# EAGLE board stb_v10_panels (EAGLE 6.1)
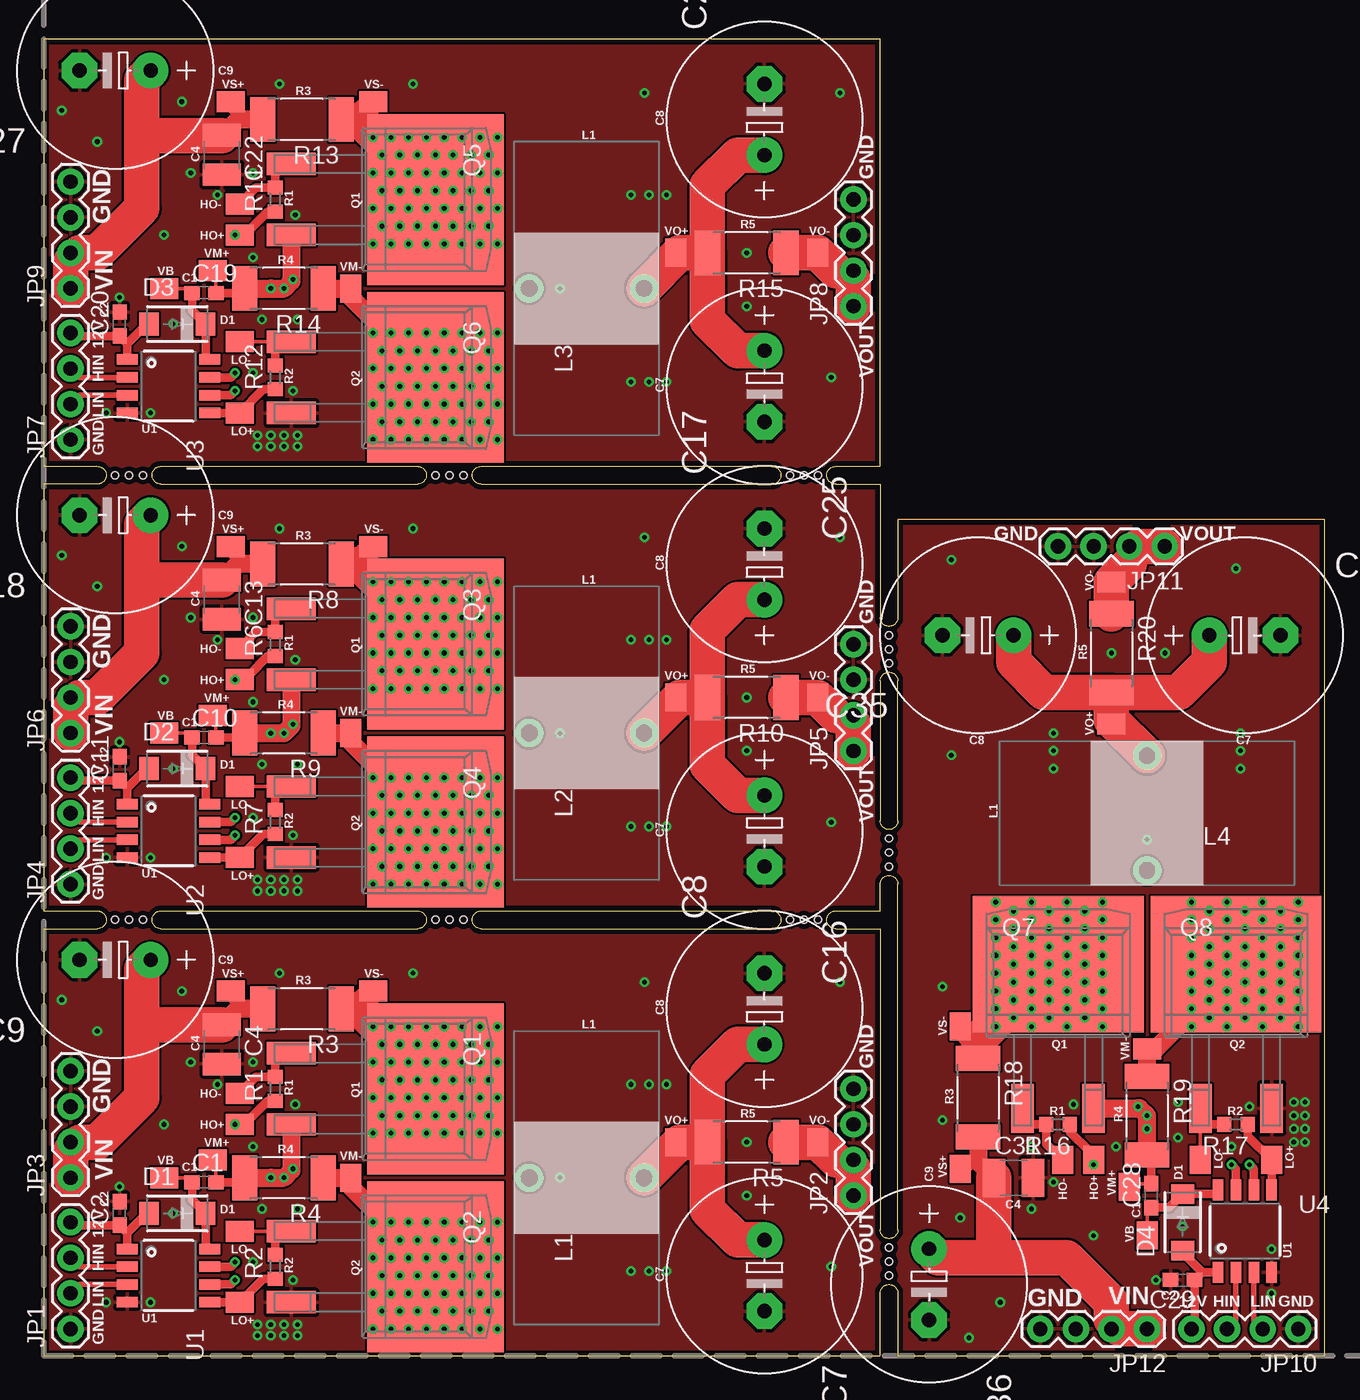
[diagram p0: board, top side]
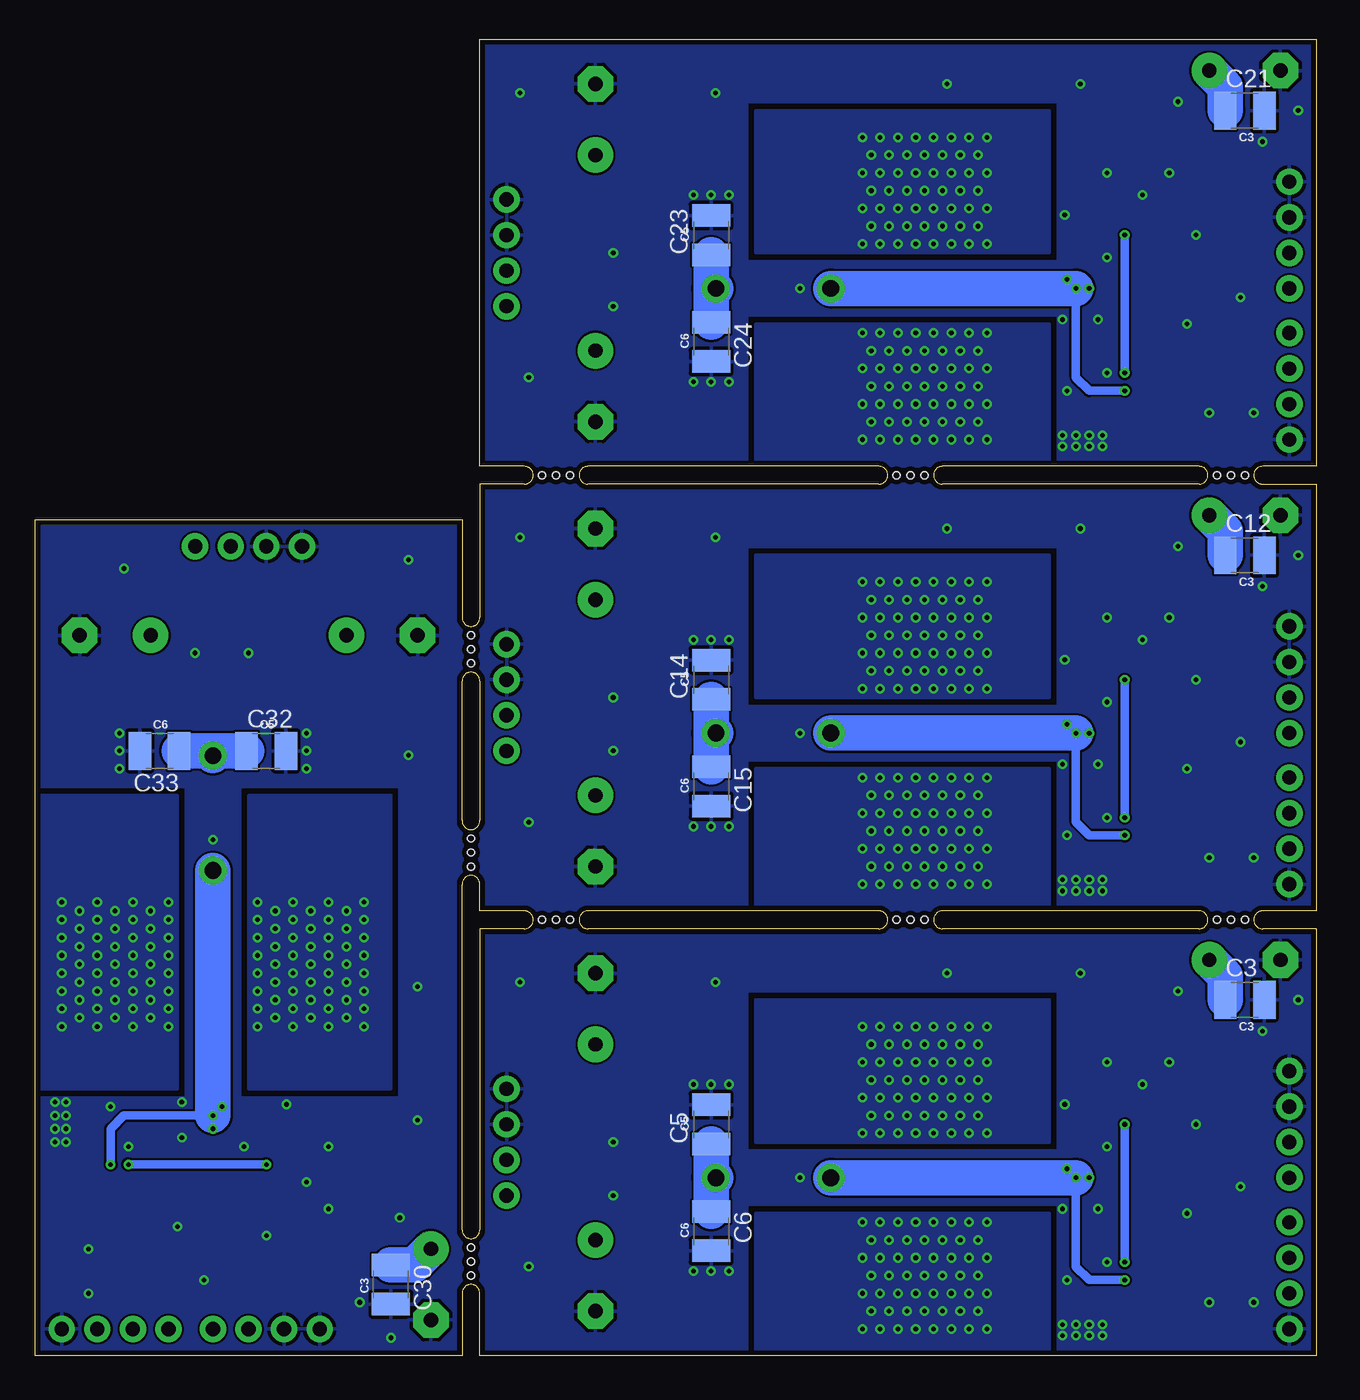
[diagram p1: board, bottom side, seen from below]

Size 91.44 x 93.98 mm. Coordinates in mm from the lower left corner, seen from the top.
Outline: 0,0 59.69,0 59.69,4.45 arc-180 60.96,4.45 60.96,0 91.44,0 91.44,59.69 60.96,59.69 60.96,52.7 arc-180 59.69,52.7 59.69,62.23 56.52,62.23 arc-180 56.52,63.5 59.69,63.5 59.69,93.98 0,93.98 0,63.5 3.81,63.5 arc-180 3.81,62.23 0,62.23 0,31.75 3.81,31.75 arc-180 3.81,30.48 0,30.48 0,0
Outline: 8.35,62.23 arc-180 8.35,63.5 26.67,63.5 arc-180 26.67,62.23 8.35,62.23
Outline: 51.98,63.5 arc-180 51.98,62.23 31.21,62.23 arc-180 31.21,63.5 51.98,63.5
Outline: 8.35,30.48 arc-180 8.35,31.75 26.67,31.75 arc-180 26.67,30.48 8.35,30.48
Outline: 31.21,30.48 arc-180 31.21,31.75 51.98,31.75 arc-180 51.98,30.48 31.21,30.48
Outline: 56.52,30.48 arc-180 56.52,31.75 59.69,31.75 59.69,33.66 arc-180 60.96,33.66 60.96,8.98 arc-180 59.69,8.98 59.69,30.48 56.52,30.48
Outline: 59.69,48.16 arc-180 60.96,48.16 60.96,38.2 arc-180 59.69,38.2 59.69,48.16
Copper layers (1*16): Top 0.0356mm / dielectric 1.5011mm / Bottom 0.0356mm
Design rules: minimum track width 6mil, minimum drill 13mil, track to track 6mil, track to pad 6mil, pad to pad 6mil, via to via 6mil, smd to smd 6mil, copper to edge 15mil, drill to drill 6mil, minimum pad ring 7mil, minimum via ring 7mil, stop-mask expansion 4mil, vias tented up to drill 20mil, thermal gap 10mil
Holes 0.5 mm at 5.08,62.87 55.24,62.87 27.94,62.87 5.08,31.11 27.94,31.11 55.24,31.11 60.33,51.44 60.33,5.71 60.33,34.92 6.08,62.87 7.08,62.87 28.94,62.87 29.94,62.87 54.24,62.87 53.24,62.87 6.08,31.11 7.08,31.11 28.94,31.11 29.94,31.11 54.24,31.11 53.24,31.11 60.33,35.92 60.33,36.92 60.33,50.44 60.33,49.44 60.33,6.71 60.33,7.71

## Footprints (pad centres in the part's own frame; a part is rotated, then mirrored left to right if it is on the bottom)
C0603 = smd 1.1 x 1: 1 -0.85,0; 2 0.85,0
C1210 = smd 1.6 x 2.7: 1 -1.4,0; 2 1.4,0
E5-13 = drill 1.016 pad 2.54: + -2.54,0 | drill 1.016 pad 2.54 octagon: - 2.54,0
SMA = smd 1.4 x 1.64: A -2.015,0; K 2.015,0
1X04 = drill 1.016 pad 1.88: 1 0,0; 2 2.54,0; 3 5.08,0; 4 7.62,0
INDUCTOR_10A_8.2MMX21MM = drill 1.2 pad 2: P$1 0,4.1; P$2 0,-4.1
D2PAK-ST = smd 1.6 x 3.5: 1-G -2.54,-10.275; 3-S 2.54,-10.275 | smd 12.2 x 9.75: 2-D 0,0
R0603 = smd 1 x 1.1: 1 -0.85,0; 2 0.85,0
R2512 = smd 1.8 x 3.2: 1 -2.8,0; 2 2.8,0
TPAD_MED = smd 1.5 x 2: 1 0,0
8-SOIC = smd 0.75 x 1.5: 1 -1.905,-2.95; 2 -0.635,-2.95; 3 0.635,-2.95; 4 1.905,-2.95; 5 1.905,2.95; 6 0.635,2.95; 7 -0.635,2.95; 8 -1.905,2.95

## Placement (x,y rotation side)
C1  10u  [C0603]  11.43,12.38 0 top
C2  100n  [C0603]  5.4,10.16 90 top
C3  2.2u  [C1210]  5.08,25.4 0 bottom
C4  2.2u  [C1210]  12.7,22.23 270 top
C5  2.2u  [C1210]  43.18,16.51 90 bottom
C6  2.2u  [C1210]  43.18,8.89 270 bottom
C7  220u  [E5-13]  51.44,5.71 270 top
C8  220u  [E5-13]  51.44,24.77 90 top
C9  220u  [E5-13]  5.08,28.26 180 top
C10  10u  [C0603]  11.43,44.13 0 top
C11  100n  [C0603]  5.4,41.91 90 top
C12  2.2u  [C1210]  5.08,57.15 0 bottom
C13  2.2u  [C1210]  12.7,53.98 270 top
C14  2.2u  [C1210]  43.18,48.26 90 bottom
C15  2.2u  [C1210]  43.18,40.64 270 bottom
C16  220u  [E5-13]  51.44,37.47 270 top
C17  220u  [E5-13]  51.44,56.52 90 top
C18  220u  [E5-13]  5.08,60.01 180 top
C19  10u  [C0603]  11.43,75.88 0 top
C20  100n  [C0603]  5.4,73.66 90 top
C21  2.2u  [C1210]  5.08,88.9 0 bottom
C22  2.2u  [C1210]  12.7,85.72 270 top
C23  2.2u  [C1210]  43.18,80.01 90 bottom
C24  2.2u  [C1210]  43.18,72.39 270 bottom
C25  220u  [E5-13]  51.44,69.22 270 top
C26  220u  [E5-13]  51.44,88.27 90 top
C27  220u  [E5-13]  5.08,91.76 180 top
C28  10u  [C0603]  79.06,11.43 90 top
C29  100n  [C0603]  81.28,5.4 180 top
C30  2.2u  [C1210]  66.04,5.08 270 bottom
C31  2.2u  [C1210]  69.22,12.7 0 top
C32  2.2u  [C1210]  74.93,43.18 0 bottom
C33  2.2u  [C1210]  82.55,43.18 180 bottom
C34  220u  [E5-13]  85.72,51.44 0 top
C35  220u  [E5-13]  66.67,51.44 180 top
C36  220u  [E5-13]  63.18,5.08 270 top
D1  SS54  [SMA]  9.53,10.16 0 top
D2  SS54  [SMA]  9.53,41.91 0 top
D3  SS54  [SMA]  9.53,73.66 0 top
D4  SS54  [SMA]  81.28,9.53 90 top
JP1  [1X04]  1.91,1.91 90 top
JP2  [1X04]  57.78,11.43 90 top
JP3  [1X04]  1.91,12.7 90 top
JP4  [1X04]  1.91,33.66 90 top
JP5  [1X04]  57.78,43.18 90 top
JP6  [1X04]  1.91,44.45 90 top
JP7  [1X04]  1.91,65.41 90 top
JP8  [1X04]  57.78,74.93 90 top
JP9  [1X04]  1.91,76.2 90 top
JP10  [1X04]  89.53,1.91 180 top
JP11  [1X04]  80.01,57.78 180 top
JP12  [1X04]  78.74,1.91 180 top
L1  60u  [INDUCTOR_10A_8.2MMX21MM]  38.73,12.7 90 top
L2  60u  [INDUCTOR_10A_8.2MMX21MM]  38.73,44.45 90 top
L3  60u  [INDUCTOR_10A_8.2MMX21MM]  38.73,76.2 90 top
L4  60u  [INDUCTOR_10A_8.2MMX21MM]  78.74,38.73 180 top
Q1  STB4XN30M5  [D2PAK-ST]  27.94,19.05 270 top
Q2  STB4XN30M5  [D2PAK-ST]  27.94,6.35 270 top
Q3  STB4XN30M5  [D2PAK-ST]  27.94,50.8 270 top
Q4  STB4XN30M5  [D2PAK-ST]  27.94,38.1 270 top
Q5  STB4XN30M5  [D2PAK-ST]  27.94,82.55 270 top
Q6  STB4XN30M5  [D2PAK-ST]  27.94,69.85 270 top
Q7  STB4XN30M5  [D2PAK-ST]  72.39,27.94 0 top
Q8  STB4XN30M5  [D2PAK-ST]  85.09,27.94 0 top
R1  50m  [R0603]  16.51,19.05 90 top
R2  50m  [R0603]  16.51,6.35 90 top
R3  5m  [R2512]  18.41,24.77 180 top
R4  5m  [R2512]  17.14,12.7 180 top
R5  5m  [R2512]  50.16,15.24 180 top
R6  50m  [R0603]  16.51,50.8 90 top
R7  50m  [R0603]  16.51,38.1 90 top
R8  5m  [R2512]  18.41,56.52 180 top
R9  5m  [R2512]  17.14,44.45 180 top
R10  5m  [R2512]  50.16,46.99 180 top
R11  50m  [R0603]  16.51,82.55 90 top
R12  50m  [R0603]  16.51,69.85 90 top
R13  5m  [R2512]  18.41,88.27 180 top
R14  5m  [R2512]  17.14,76.2 180 top
R15  5m  [R2512]  50.16,78.74 180 top
R16  50m  [R0603]  72.39,16.51 180 top
R17  50m  [R0603]  85.09,16.51 180 top
R18  5m  [R2512]  66.67,18.41 270 top
R19  5m  [R2512]  78.74,17.14 270 top
R20  5m  [R2512]  76.2,50.16 270 top
TP1  TPADMEDIUM  [TPAD_MED]  13.97,16.51 90 top
TP2  TPADMEDIUM  [TPAD_MED]  13.97,18.73 90 top
TP3  TPADMEDIUM  [TPAD_MED]  13.34,26.04 90 top
TP4  TPADMEDIUM  [TPAD_MED]  23.5,26.04 90 top
TP5  TPADMEDIUM  [TPAD_MED]  13.97,3.81 90 top
TP6  TPADMEDIUM  [TPAD_MED]  13.97,8.89 90 top
TP7  TPADMEDIUM  [TPAD_MED]  12.06,13.97 270 top
TP8  TPADMEDIUM  [TPAD_MED]  21.91,12.7 0 top
TP9  TPADMEDIUM  [TPAD_MED]  8.57,12.7 270 top
TP10  TPADMEDIUM  [TPAD_MED]  45.09,15.24 0 top
TP11  TPADMEDIUM  [TPAD_MED]  55.24,15.24 0 top
TP12  TPADMEDIUM  [TPAD_MED]  13.97,48.26 90 top
TP13  TPADMEDIUM  [TPAD_MED]  13.97,50.48 90 top
TP14  TPADMEDIUM  [TPAD_MED]  13.34,57.78 90 top
TP15  TPADMEDIUM  [TPAD_MED]  23.5,57.78 90 top
TP16  TPADMEDIUM  [TPAD_MED]  13.97,35.56 90 top
TP17  TPADMEDIUM  [TPAD_MED]  13.97,40.64 90 top
TP18  TPADMEDIUM  [TPAD_MED]  12.06,45.72 270 top
TP19  TPADMEDIUM  [TPAD_MED]  21.91,44.45 0 top
TP20  TPADMEDIUM  [TPAD_MED]  8.57,44.45 270 top
TP21  TPADMEDIUM  [TPAD_MED]  45.09,46.99 0 top
TP22  TPADMEDIUM  [TPAD_MED]  55.24,46.99 0 top
TP23  TPADMEDIUM  [TPAD_MED]  13.97,80.01 90 top
TP24  TPADMEDIUM  [TPAD_MED]  13.97,82.23 90 top
TP25  TPADMEDIUM  [TPAD_MED]  13.34,89.53 90 top
TP26  TPADMEDIUM  [TPAD_MED]  23.5,89.53 90 top
TP27  TPADMEDIUM  [TPAD_MED]  13.97,67.31 90 top
TP28  TPADMEDIUM  [TPAD_MED]  13.97,72.39 90 top
TP29  TPADMEDIUM  [TPAD_MED]  12.06,77.47 270 top
TP30  TPADMEDIUM  [TPAD_MED]  21.91,76.2 0 top
TP31  TPADMEDIUM  [TPAD_MED]  8.57,76.2 270 top
TP32  TPADMEDIUM  [TPAD_MED]  45.09,78.74 0 top
TP33  TPADMEDIUM  [TPAD_MED]  55.24,78.74 0 top
TP34  TPADMEDIUM  [TPAD_MED]  74.93,13.97 180 top
TP35  TPADMEDIUM  [TPAD_MED]  72.71,13.97 180 top
TP36  TPADMEDIUM  [TPAD_MED]  65.41,13.34 180 top
TP37  TPADMEDIUM  [TPAD_MED]  65.41,23.5 180 top
TP38  TPADMEDIUM  [TPAD_MED]  87.63,13.97 180 top
TP39  TPADMEDIUM  [TPAD_MED]  82.55,13.97 180 top
TP40  TPADMEDIUM  [TPAD_MED]  77.47,12.06 0 top
TP41  TPADMEDIUM  [TPAD_MED]  78.74,21.91 90 top
TP42  TPADMEDIUM  [TPAD_MED]  78.74,8.57 0 top
TP43  TPADMEDIUM  [TPAD_MED]  76.2,45.09 90 top
TP44  TPADMEDIUM  [TPAD_MED]  76.2,55.24 90 top
U1  EG2131  [8-SOIC]  8.89,5.71 270 top
U2  EG2131  [8-SOIC]  8.89,37.47 270 top
U3  EG2131  [8-SOIC]  8.89,69.22 270 top
U4  EG2131  [8-SOIC]  85.72,8.89 0 top

## Library data of the parts
C1-C36 R1-R20 = resistor
D1-D4 L1-L4 Q1-Q8 TP1-TP44 U1-U4 = custom
JP1-JP12 = SparkFun

## Nets
12V: C2.1 D1.A JP1.4 U1.1
12V1: C11.1 D2.A JP4.4 U2.1
12V2: C20.1 D3.A JP7.4 U3.1
12V3: C29.1 D4.A JP10.4 U4.1
GND: C2.2 C3.2 C4.2 C5.2 C6.2 C7.- C8.- C9.- JP1.1 JP2.3 JP2.4 JP3.3 JP3.4 Q2.3-S U1.4
GND1: C11.2 C12.2 C13.2 C14.2 C15.2 C16.- C17.- C18.- JP4.1 JP5.3 JP5.4 JP6.3 JP6.4 Q4.3-S U2.4
GND2: C20.2 C21.2 C22.2 C23.2 C24.2 C25.- C26.- C27.- JP7.1 JP8.3 JP8.4 JP9.3 JP9.4 Q6.3-S U3.4
GND3: C29.2 C30.2 C31.2 C32.2 C33.2 C34.- C35.- C36.- JP10.1 JP11.3 JP11.4 JP12.3 JP12.4 Q8.3-S U4.4
HIN: JP1.3 U1.2
HIN1: JP4.3 U2.2
HIN2: JP7.3 U3.2
HIN3: JP10.3 U4.2
HO: R1.1 TP1.1 U1.7
HO1: R6.1 TP12.1 U2.7
HO2: R11.1 TP23.1 U3.7
HO3: R16.1 TP34.1 U4.7
LIN_N: JP1.2 U1.3
LIN_N1: JP4.2 U2.3
LIN_N2: JP7.2 U3.3
LIN_N3: JP10.2 U4.3
LO: R2.1 TP5.1 U1.5
LO1: R7.1 TP16.1 U2.5
LO2: R12.1 TP27.1 U3.5
LO3: R17.1 TP38.1 U4.5
VBST: C1.1 D1.K TP9.1 U1.8
VBST1: C10.1 D2.K TP20.1 U2.8
VBST2: C19.1 D3.K TP31.1 U3.8
VBST3: C28.1 D4.K TP42.1 U4.8
VGH: Q1.1-G R1.2 TP2.1
VGH1: Q3.1-G R6.2 TP13.1
VGH2: Q5.1-G R11.2 TP24.1
VGH3: Q7.1-G R16.2 TP35.1
VGL: Q2.1-G R2.2 TP6.1
VGL1: Q4.1-G R7.2 TP17.1
VGL2: Q6.1-G R12.2 TP28.1
VGL3: Q8.1-G R17.2 TP39.1
VMID: C1.2 L1.P$1 Q1.3-S R4.2 TP7.1 U1.6
VMID1: C10.2 L2.P$1 Q3.3-S R9.2 TP18.1 U2.6
VMID2: C19.2 L3.P$1 Q5.3-S R14.2 TP29.1 U3.6
VMID3: C28.2 L4.P$1 Q7.3-S R19.2 TP40.1 U4.6
VMID_SNS: Q2.2-D R4.1 TP8.1
VMID_SNS1: Q4.2-D R9.1 TP19.1
VMID_SNS2: Q6.2-D R14.1 TP30.1
VMID_SNS3: Q8.2-D R19.1 TP41.1
VO: JP2.1 JP2.2 R5.1 TP11.1
VO1: JP5.1 JP5.2 R10.1 TP22.1
VO2: JP8.1 JP8.2 R15.1 TP33.1
VO3: JP11.1 JP11.2 R20.1 TP44.1
VO_RAW: C5.1 C6.1 C7.+ C8.+ L1.P$2 R5.2 TP10.1
VO_RAW1: C14.1 C15.1 C16.+ C17.+ L2.P$2 R10.2 TP21.1
VO_RAW2: C23.1 C24.1 C25.+ C26.+ L3.P$2 R15.2 TP32.1
VO_RAW3: C32.1 C33.1 C34.+ C35.+ L4.P$2 R20.2 TP43.1
VS: C3.1 C4.1 C9.+ JP3.1 JP3.2 R3.2 TP3.1
VS1: C12.1 C13.1 C18.+ JP6.1 JP6.2 R8.2 TP14.1
VS2: C21.1 C22.1 C27.+ JP9.1 JP9.2 R13.2 TP25.1
VS3: C30.1 C31.1 C36.+ JP12.1 JP12.2 R18.2 TP36.1
VS_SNS: Q1.2-D R3.1 TP4.1
VS_SNS1: Q3.2-D R8.1 TP15.1
VS_SNS2: Q5.2-D R13.1 TP26.1
VS_SNS3: Q7.2-D R18.1 TP37.1

## Tracks (layer width: path | path; a pad name or v marks a point on that pad's centre or on a via)
12V
  Top 0.61: U1.1 5.94,8.77 | 5.94,8.77 C2.1 2.12,9.31 JP1.4 | D1.A 7.33,10.16 5.94,8.77
12V1
  Top 0.61: U2.1 5.94,40.52 | 5.94,40.52 C11.1 2.12,41.06 JP4.4 | D2.A 7.33,41.91 5.94,40.52
12V2
  Top 0.61: U3.1 5.94,72.27 | 5.94,72.27 C20.1 2.12,72.81 JP7.4 | D3.A 7.33,73.66 5.94,72.27
12V3
  Top 0.61: U4.1 82.67,5.94 | 82.67,5.94 C29.1 82.13,2.12 JP10.4 | D4.A 81.28,7.33 82.67,5.94
GND  (via drill 0.33)
  other vias: 7.62,3.81 4.45,3.81 5.4,12.06 14.92,6.67 9.21,10.16 14.92,14.92 14.92,20.95 12.38,19.37 10.48,20.95 3.81,23.18 41.91,19.37 43.18,19.37 44.45,19.37 41.91,6.03 43.18,6.03 44.45,6.03 50.16,15.24 36.83,12.7 50.16,11.43 15.56,10.48 18.1,10.48 17.78,5.4 16.19,2.22 17.14,2.22 18.1,2.22 18.1,1.43 17.14,1.43 16.19,1.43 15.24,2.22 8.57,16.51 9.84,26.04 16.83,27.3 26.35,27.3 42.86,26.67 56.2,6.35 56.83,26.67 15.24,1.43 17.94,17.94 1.27,25.4
  pour Top: 0,30.48 59.69,30.48 59.69,0 0,0
  pour Bottom: 0,30.48 18.41,30.48 18.41,0 0,0
  pour Bottom: 18.41,30.48 59.69,30.48 59.69,26.04 18.41,26.04
  pour Bottom: 18.41,14.61 59.69,14.61 59.69,10.79 18.41,10.79
  pour Bottom: 40.64,26.04 59.69,26.04 59.69,14.61 40.64,14.61
  pour Bottom: 40.64,10.79 59.69,10.79 59.69,0 40.64,0
GND1  (via drill 0.33)
  other vias: 7.62,35.56 4.45,35.56 5.4,43.81 14.92,38.42 9.21,41.91 14.92,46.67 14.92,52.7 12.38,51.12 10.48,52.7 3.81,54.93 41.91,51.12 43.18,51.12 44.45,51.12 41.91,37.78 43.18,37.78 44.45,37.78 50.16,46.99 36.83,44.45 50.16,43.18 15.56,42.23 18.1,42.23 17.78,37.15 16.19,33.97 17.14,33.97 18.1,33.97 18.1,33.18 17.14,33.18 16.19,33.18 15.24,33.97 8.57,48.26 9.84,57.78 16.83,59.05 26.35,59.05 42.86,58.42 56.2,38.1 56.83,58.42 15.24,33.18 17.94,49.69 1.27,57.15
  pour Top: 0,62.23 59.69,62.23 59.69,31.75 0,31.75
  pour Bottom: 0,62.23 18.41,62.23 18.41,31.75 0,31.75
  pour Bottom: 18.41,62.23 59.69,62.23 59.69,57.78 18.41,57.78
  pour Bottom: 18.41,46.35 59.69,46.35 59.69,42.55 18.41,42.55
  pour Bottom: 40.64,57.78 59.69,57.78 59.69,46.35 40.64,46.35
  pour Bottom: 40.64,42.55 59.69,42.55 59.69,31.75 40.64,31.75
GND2  (via drill 0.33)
  other vias: 7.62,67.31 4.45,67.31 5.4,75.56 14.92,70.17 9.21,73.66 14.92,78.42 14.92,84.45 12.38,82.87 10.48,84.45 3.81,86.68 41.91,82.87 43.18,82.87 44.45,82.87 41.91,69.53 43.18,69.53 44.45,69.53 50.16,78.74 36.83,76.2 50.16,74.93 15.56,73.98 18.1,73.98 17.78,68.9 16.19,65.72 17.14,65.72 18.1,65.72 18.1,64.93 17.14,64.93 16.19,64.93 15.24,65.72 8.57,80.01 9.84,89.53 16.83,90.81 26.35,90.81 42.86,90.17 56.2,69.85 56.83,90.17 15.24,64.93 17.94,81.44 1.27,88.9
  pour Top: 0,93.98 59.69,93.98 59.69,63.5 0,63.5
  pour Bottom: 0,93.98 18.41,93.98 18.41,63.5 0,63.5
  pour Bottom: 18.41,93.98 59.69,93.98 59.69,89.53 18.41,89.53
  pour Bottom: 18.41,78.11 59.69,78.11 59.69,74.3 18.41,74.3
  pour Bottom: 40.64,89.53 59.69,89.53 59.69,78.11 40.64,78.11
  pour Bottom: 40.64,74.3 59.69,74.3 59.69,63.5 40.64,63.5
GND3  (via drill 0.33)
  other vias: 87.63,7.62 87.63,4.45 79.38,5.4 84.77,14.92 81.28,9.21 76.52,14.92 70.48,14.92 72.07,12.38 70.48,10.48 68.26,3.81 72.07,41.91 72.07,43.18 72.07,44.45 85.41,41.91 85.41,43.18 85.41,44.45 76.2,50.16 78.74,36.83 80.01,50.16 80.96,15.56 80.96,18.1 86.04,17.78 89.22,16.19 89.22,17.14 89.22,18.1 90.01,18.1 90.01,17.14 90.01,16.19 89.22,15.24 74.93,8.57 65.41,9.84 64.14,16.83 64.14,26.35 64.77,42.86 85.09,56.2 64.77,56.83 90.01,15.24 73.5,17.94 66.04,1.27
  pour Top: 60.96,0 60.96,59.69 91.44,59.69 91.44,0
  pour Bottom: 60.96,0 60.96,18.41 91.44,18.41 91.44,0
  pour Bottom: 60.96,18.41 60.96,59.69 65.41,59.69 65.41,18.41
  pour Bottom: 76.83,18.41 76.83,59.69 80.64,59.69 80.64,18.41
  pour Bottom: 65.41,40.64 65.41,59.69 76.83,59.69 76.83,40.64
  pour Bottom: 80.64,40.64 80.64,59.69 91.44,59.69 91.44,40.64
HIN
  Top 0.406: U1.2 2.54,6.35 JP1.3
HIN1
  Top 0.406: U2.2 2.54,38.1 JP4.3
HIN2
  Top 0.406: U3.2 2.54,69.85 JP7.3
HIN3
  Top 0.406: U4.2 85.09,2.54 JP10.3
HO  (via drill 0.33)
  Top 0.61: U1.7 13.34,6.35 v13.65,6.67 | v13.65,16.51 TP1.1 14.29,16.83 14.61,16.83 15.98,18.2 R1.1
  Bottom 0.61: v13.65,6.67 v13.65,16.51
HO1  (via drill 0.33)
  Top 0.61: U2.7 13.34,38.1 v13.65,38.42 | v13.65,48.26 TP12.1 14.29,48.58 14.61,48.58 15.98,49.95 R6.1
  Bottom 0.61: v13.65,38.42 v13.65,48.26
HO2  (via drill 0.33)
  Top 0.61: U3.7 13.34,69.85 v13.65,70.17 | v13.65,80.01 TP23.1 14.29,80.33 14.61,80.33 15.98,81.7 R11.1
  Bottom 0.61: v13.65,70.17 v13.65,80.01
HO3  (via drill 0.33)
  Top 0.61: U4.7 85.09,13.34 v84.77,13.65 | v74.93,13.65 TP34.1 74.61,14.29 74.61,14.61 73.24,15.98 R16.1
  Bottom 0.61: v84.77,13.65 v74.93,13.65
LIN_N
  Top 0.406: U1.3 2.54,5.08 JP1.2
LIN_N1
  Top 0.406: U2.3 2.54,36.83 JP4.2
LIN_N2
  Top 0.406: U3.3 2.54,68.58 JP7.2
LIN_N3
  Top 0.406: U4.3 86.36,2.54 JP10.2
LO
  Top 0.61: U1.5 TP5.1 15.66,5.5 R2.1
LO1
  Top 0.61: U2.5 TP16.1 15.66,37.25 R7.1
LO2
  Top 0.61: U3.5 TP27.1 15.66,69 R12.1
LO3
  Top 0.61: U4.5 TP38.1 85.94,15.66 R17.1
VBST
  Top 0.254: TP9.1 10.26,12.7 C1.1
  Top 0.61: U1.8 11.54,7.92 D1.K 10.58,11.12 C1.1
VBST1
  Top 0.254: TP20.1 10.26,44.45 C10.1
  Top 0.61: U2.8 11.54,39.67 D2.K 10.58,42.87 C10.1
VBST2
  Top 0.254: TP31.1 10.26,76.2 C19.1
  Top 0.61: U3.8 11.54,71.42 D3.K 10.58,74.62 C19.1
VBST3
  Top 0.254: TP42.1 78.74,10.26 C28.1
  Top 0.61: U4.8 83.52,11.54 D4.K 80.32,10.58 C28.1
VGH
  Top 0.61: TP2.1 15.14,19.9 R1.2 16.51,20.95 17.14,21.59 Q1.1-G
VGH1
  Top 0.61: TP13.1 15.14,51.65 R6.2 16.51,52.7 17.14,53.34 Q3.1-G
VGH2
  Top 0.61: TP24.1 15.14,83.4 R11.2 16.51,84.45 17.14,85.09 Q5.1-G
VGH3
  Top 0.61: TP35.1 71.54,15.14 R16.2 70.48,16.51 69.85,17.14 Q7.1-G
VGL
  Top 0.254: TP6.1 17.14,8.89 Q2.1-G
  Top 0.61: R2.2 16.51,8.26 17.14,8.89
VGL1
  Top 0.254: TP17.1 17.14,40.64 Q4.1-G
  Top 0.61: R7.2 16.51,40.01 17.14,40.64
VGL2
  Top 0.254: TP28.1 17.14,72.39 Q6.1-G
  Top 0.61: R12.2 16.51,71.75 17.14,72.39
VGL3
  Top 0.254: TP39.1 82.55,17.14 Q8.1-G
  Top 0.61: R17.2 83.19,16.51 82.55,17.14
VMID  (via drill 0.33)
  Top 0.254: C1.2 12.28,13.76 TP7.1 | v17.78,13.34 17.66,13.34
  Top 0.61: C1.2 14.03,12.38 R4.2 | U1.6 13.34,5.08 v13.65,5.4
  Top 1.27: Q1.3-S 17.66,13.34 17.66,13.22 v17.14,12.7 v16.19,12.7 R4.2
  Bottom 0.61: v13.65,5.4 16.19,5.4 17.14,6.35 v17.14,12.7
  Bottom 2.54: L1.P$1 v17.14,12.7
VMID1  (via drill 0.33)
  Top 0.254: C10.2 12.28,45.51 TP18.1 | v17.78,45.09 17.66,45.09
  Top 0.61: C10.2 14.03,44.13 R9.2 | U2.6 13.34,36.83 v13.65,37.15
  Top 1.27: Q3.3-S 17.66,45.09 17.66,44.97 v17.14,44.45 v16.19,44.45 R9.2
  Bottom 0.61: v13.65,37.15 16.19,37.15 17.14,38.1 v17.14,44.45
  Bottom 2.54: L2.P$1 v17.14,44.45
VMID2  (via drill 0.33)
  Top 0.254: C19.2 12.28,77.25 TP29.1 | v17.78,76.83 17.66,76.83
  Top 0.61: C19.2 14.03,75.88 R14.2 | U3.6 13.34,68.58 v13.65,68.9
  Top 1.27: Q5.3-S 17.66,76.83 17.66,76.72 v17.14,76.2 v16.19,76.2 R14.2
  Bottom 0.61: v13.65,68.9 16.19,68.9 17.14,69.85 v17.14,76.2
  Bottom 2.54: L3.P$1 v17.14,76.2
VMID3  (via drill 0.33)
  Top 0.254: C28.2 77.69,12.28 TP40.1 | v78.11,17.78 78.11,17.66
  Top 0.61: C28.2 79.06,14.03 R19.2 | U4.6 86.36,13.34 v86.04,13.65
  Top 1.27: Q7.3-S 78.11,17.66 78.22,17.66 v78.74,17.14 v78.74,16.19 R19.2
  Bottom 0.61: v86.04,13.65 86.04,16.19 85.09,17.14 v78.74,17.14
  Bottom 2.54: L4.P$1 v78.74,17.14
VMID_SNS  (via drill 0.33)
  Top 0.254: 21.91,12.06 21.91,11.75 23.5,10.16 v23.5,9.53
  Top 1.27: R4.1 TP8.1 21.91,12.06 27.62,6.35 Q2.2-D
  other vias: 24.77,9.53 26.04,9.53 27.3,9.53 28.57,9.53 29.84,9.53 31.11,9.53 32.38,9.53 31.75,8.26 30.48,8.26 29.21,8.26 27.94,8.26 26.67,8.26 25.4,8.26 24.13,8.26 23.5,6.99 24.77,6.99 26.04,6.99 27.3,6.99 28.57,6.99 29.84,6.99 31.11,6.99 32.38,6.99 31.75,5.71 30.48,5.71 29.21,5.71 27.94,5.71 26.67,5.71 25.4,5.71 24.13,5.71 23.5,4.45 24.77,4.45 26.04,4.45 27.3,4.45 28.57,4.45 29.84,4.45 31.11,4.45 32.38,4.45 31.75,3.17 30.48,3.17 29.21,3.17 27.94,3.17 26.67,3.17 25.4,3.17 24.13,3.17 23.5,1.91 24.77,1.91 26.04,1.91 27.3,1.91 28.57,1.91 29.84,1.91 31.11,1.91 32.38,1.91
  pour Bottom: 19.05,10.16 40.01,10.16 40.01,0 19.05,0
VMID_SNS1  (via drill 0.33)
  Top 0.254: 21.91,43.81 21.91,43.5 23.5,41.91 v23.5,41.27
  Top 1.27: R9.1 TP19.1 21.91,43.81 27.62,38.1 Q4.2-D
  other vias: 24.77,41.27 26.04,41.27 27.3,41.27 28.57,41.27 29.84,41.27 31.11,41.27 32.38,41.27 31.75,40.01 30.48,40.01 29.21,40.01 27.94,40.01 26.67,40.01 25.4,40.01 24.13,40.01 23.5,38.73 24.77,38.73 26.04,38.73 27.3,38.73 28.57,38.73 29.84,38.73 31.11,38.73 32.38,38.73 31.75,37.47 30.48,37.47 29.21,37.47 27.94,37.47 26.67,37.47 25.4,37.47 24.13,37.47 23.5,36.2 24.77,36.2 26.04,36.2 27.3,36.2 28.57,36.2 29.84,36.2 31.11,36.2 32.38,36.2 31.75,34.92 30.48,34.92 29.21,34.92 27.94,34.92 26.67,34.92 25.4,34.92 24.13,34.92 23.5,33.66 24.77,33.66 26.04,33.66 27.3,33.66 28.57,33.66 29.84,33.66 31.11,33.66 32.38,33.66
  pour Bottom: 19.05,41.91 40.01,41.91 40.01,31.75 19.05,31.75
VMID_SNS2  (via drill 0.33)
  Top 0.254: 21.91,75.56 21.91,75.25 23.5,73.66 v23.5,73.03
  Top 1.27: R14.1 TP30.1 21.91,75.56 27.62,69.85 Q6.2-D
  other vias: 24.77,73.03 26.04,73.03 27.3,73.03 28.57,73.03 29.84,73.03 31.11,73.03 32.38,73.03 31.75,71.75 30.48,71.75 29.21,71.75 27.94,71.75 26.67,71.75 25.4,71.75 24.13,71.75 23.5,70.48 24.77,70.48 26.04,70.48 27.3,70.48 28.57,70.48 29.84,70.48 31.11,70.48 32.38,70.48 31.75,69.22 30.48,69.22 29.21,69.22 27.94,69.22 26.67,69.22 25.4,69.22 24.13,69.22 23.5,67.94 24.77,67.94 26.04,67.94 27.3,67.94 28.57,67.94 29.84,67.94 31.11,67.94 32.38,67.94 31.75,66.67 30.48,66.67 29.21,66.67 27.94,66.67 26.67,66.67 25.4,66.67 24.13,66.67 23.5,65.41 24.77,65.41 26.04,65.41 27.3,65.41 28.57,65.41 29.84,65.41 31.11,65.41 32.38,65.41
  pour Bottom: 19.05,73.66 40.01,73.66 40.01,63.5 19.05,63.5
VMID_SNS3  (via drill 0.33)
  Top 0.254: 79.38,21.91 79.69,21.91 81.28,23.5 v81.92,23.5
  Top 1.27: R19.1 TP41.1 79.38,21.91 85.09,27.62 Q8.2-D
  other vias: 81.92,24.77 81.92,26.04 81.92,27.3 81.92,28.57 81.92,29.84 81.92,31.11 81.92,32.38 83.19,31.75 83.19,30.48 83.19,29.21 83.19,27.94 83.19,26.67 83.19,25.4 83.19,24.13 84.45,23.5 84.45,24.77 84.45,26.04 84.45,27.3 84.45,28.57 84.45,29.84 84.45,31.11 84.45,32.38 85.72,31.75 85.72,30.48 85.72,29.21 85.72,27.94 85.72,26.67 85.72,25.4 85.72,24.13 87,23.5 87,24.77 87,26.04 87,27.3 87,28.57 87,29.84 87,31.11 87,32.38 88.27,31.75 88.27,30.48 88.27,29.21 88.27,27.94 88.27,26.67 88.27,25.4 88.27,24.13 89.53,23.5 89.53,24.77 89.53,26.04 89.53,27.3 89.53,28.57 89.53,29.84 89.53,31.11 89.53,32.38
  pour Bottom: 81.28,19.05 81.28,40.01 91.44,40.01 91.44,19.05
VO
  Top 0.254: JP2.2 57.78,13.34
  Top 1.27: 56.52,13.97 JP2.2
  Top 2.54: JP2.1 57.78,13.34 | R5.1 TP11.1 56.52,13.97
VO1
  Top 0.254: JP5.2 57.78,45.09
  Top 1.27: 56.52,45.72 JP5.2
  Top 2.54: JP5.1 57.78,45.09 | R10.1 TP22.1 56.52,45.72
VO2
  Top 0.254: JP8.2 57.78,76.83
  Top 1.27: 56.52,77.47 JP8.2
  Top 2.54: JP8.1 57.78,76.83 | R15.1 TP33.1 56.52,77.47
VO3
  Top 0.254: JP11.2 78.11,57.78
  Top 1.27: 77.47,56.52 JP11.2
  Top 2.54: JP11.1 78.11,57.78 | R20.1 TP44.1 77.47,56.52
VO_RAW
  Top 0.254: 45.38,15.24 TP10.1
  Top 2.54: R5.2 45.38,15.24 L1.P$2 | C8.+ 49.53,22.23 47.37,20.06 R5.2 | C7.+ 49.53,8.26 47.37,10.42 R5.2
  Bottom 2.54: C5.1 43.18,12.7 | 43.18,12.7 C6.1 | L1.P$2 43.18,12.7
VO_RAW1
  Top 0.254: 45.38,46.99 TP21.1
  Top 2.54: R10.2 45.38,46.99 L2.P$2 | C17.+ 49.53,53.98 47.37,51.81 R10.2 | C16.+ 49.53,40.01 47.37,42.17 R10.2
  Bottom 2.54: C14.1 43.18,44.45 | 43.18,44.45 C15.1 | L2.P$2 43.18,44.45
VO_RAW2
  Top 0.254: 45.38,78.74 TP32.1
  Top 2.54: R15.2 45.38,78.74 L3.P$2 | C26.+ 49.53,85.72 47.37,83.56 R15.2 | C25.+ 49.53,71.75 47.37,73.92 R15.2
  Bottom 2.54: C23.1 43.18,76.2 | 43.18,76.2 C24.1 | L3.P$2 43.18,76.2
VO_RAW3
  Top 0.254: 76.2,45.38 TP43.1
  Top 2.54: R20.2 76.2,45.38 L4.P$2 | C35.+ 69.22,49.53 71.38,47.37 R20.2 | C34.+ 83.19,49.53 81.02,47.37 R20.2
  Bottom 2.54: C32.1 78.74,43.18 | 78.74,43.18 C33.1 | L4.P$2 78.74,43.18
VS
  Top 0.254: TP3.1 13.34,25.27 13.84,24.77
  Top 1.27: 1.91,14.61 JP3.2 2.54,15.24 | R3.2 13.84,24.77 C4.1
  Top 2.54: JP3.1 1.91,14.61 | 2.54,15.24 3.81,15.24 6.99,18.41 6.99,23.5 | 6.99,23.5 6.99,27.62 C9.+ | C4.1 7.12,23.62 6.99,23.5
  Bottom 2.54: C3.1 6.48,27.12 C9.+
VS1
  Top 0.254: TP14.1 13.34,57.02 13.84,56.52
  Top 1.27: 1.91,46.35 JP6.2 2.54,46.99 | R8.2 13.84,56.52 C13.1
  Top 2.54: JP6.1 1.91,46.35 | 2.54,46.99 3.81,46.99 6.99,50.16 6.99,55.24 | 6.99,55.24 6.99,59.37 C18.+ | C13.1 7.12,55.38 6.99,55.24
  Bottom 2.54: C12.1 6.48,58.87 C18.+
VS2
  Top 0.254: TP25.1 13.34,88.77 13.84,88.27
  Top 1.27: 1.91,78.11 JP9.2 2.54,78.74 | R13.2 13.84,88.27 C22.1
  Top 2.54: JP9.1 1.91,78.11 | 2.54,78.74 3.81,78.74 6.99,81.92 6.99,87 | 6.99,87 6.99,91.12 C27.+ | C22.1 7.12,87.12 6.99,87
  Bottom 2.54: C21.1 6.48,90.62 C27.+
VS3
  Top 0.254: TP36.1 66.17,13.34 66.67,13.84
  Top 1.27: 76.83,1.91 JP12.2 76.2,2.54 | R18.2 66.67,13.84 C31.1
  Top 2.54: JP12.1 76.83,1.91 | 76.2,2.54 76.2,3.81 73.03,6.99 67.94,6.99 | 67.94,6.99 63.82,6.99 C36.+ | C31.1 67.81,7.12 67.94,6.99
  Bottom 2.54: C30.1 64.32,6.48 C36.+
VS_SNS  (via drill 0.33)
  Top 0.254: TP4.1 22.48,26.04 R3.1 | Q1.2-D v27.94,19.68
  Top 1.27: 22.54,24.77 R3.1
  Top 2.54: Q1.2-D 27.94,19.37 22.54,24.77
  other vias: 23.5,15.88 24.77,15.88 26.04,15.88 27.3,15.88 28.57,15.88 29.84,15.88 31.11,15.88 32.38,15.88 24.13,17.14 25.4,17.14 26.67,17.14 27.94,17.14 29.21,17.14 30.48,17.14 31.75,17.14 23.5,18.41 24.77,18.41 26.04,18.41 27.3,18.41 28.57,18.41 29.84,18.41 31.11,18.41 32.38,18.41 31.75,19.68 30.48,19.68 29.21,19.68 26.67,19.68 25.4,19.68 24.13,19.68 23.5,20.95 24.77,20.95 26.04,20.95 27.3,20.95 28.57,20.95 29.84,20.95 31.11,20.95 32.38,20.95 31.75,22.23 30.48,22.23 29.21,22.23 27.94,22.23 26.67,22.23 25.4,22.23 24.13,22.23 23.5,23.5 24.77,23.5 26.04,23.5 27.3,23.5 28.57,23.5 29.84,23.5 31.11,23.5 32.38,23.5
  pour Bottom: 19.05,25.4 40.01,25.4 40.01,15.24 19.05,15.24
VS_SNS1  (via drill 0.33)
  Top 0.254: TP15.1 22.48,57.78 R8.1 | Q3.2-D v27.94,51.44
  Top 1.27: 22.54,56.52 R8.1
  Top 2.54: Q3.2-D 27.94,51.12 22.54,56.52
  other vias: 23.5,47.62 24.77,47.62 26.04,47.62 27.3,47.62 28.57,47.62 29.84,47.62 31.11,47.62 32.38,47.62 24.13,48.9 25.4,48.9 26.67,48.9 27.94,48.9 29.21,48.9 30.48,48.9 31.75,48.9 23.5,50.16 24.77,50.16 26.04,50.16 27.3,50.16 28.57,50.16 29.84,50.16 31.11,50.16 32.38,50.16 31.75,51.44 30.48,51.44 29.21,51.44 26.67,51.44 25.4,51.44 24.13,51.44 23.5,52.7 24.77,52.7 26.04,52.7 27.3,52.7 28.57,52.7 29.84,52.7 31.11,52.7 32.38,52.7 31.75,53.98 30.48,53.98 29.21,53.98 27.94,53.98 26.67,53.98 25.4,53.98 24.13,53.98 23.5,55.24 24.77,55.24 26.04,55.24 27.3,55.24 28.57,55.24 29.84,55.24 31.11,55.24 32.38,55.24
  pour Bottom: 19.05,57.15 40.01,57.15 40.01,46.99 19.05,46.99
VS_SNS2  (via drill 0.33)
  Top 0.254: TP26.1 22.48,89.53 R13.1 | Q5.2-D v27.94,83.19
  Top 1.27: 22.54,88.27 R13.1
  Top 2.54: Q5.2-D 27.94,82.87 22.54,88.27
  other vias: 23.5,79.38 24.77,79.38 26.04,79.38 27.3,79.38 28.57,79.38 29.84,79.38 31.11,79.38 32.38,79.38 24.13,80.64 25.4,80.64 26.67,80.64 27.94,80.64 29.21,80.64 30.48,80.64 31.75,80.64 23.5,81.92 24.77,81.92 26.04,81.92 27.3,81.92 28.57,81.92 29.84,81.92 31.11,81.92 32.38,81.92 31.75,83.19 30.48,83.19 29.21,83.19 26.67,83.19 25.4,83.19 24.13,83.19 23.5,84.45 24.77,84.45 26.04,84.45 27.3,84.45 28.57,84.45 29.84,84.45 31.11,84.45 32.38,84.45 31.75,85.72 30.48,85.72 29.21,85.72 27.94,85.72 26.67,85.72 25.4,85.72 24.13,85.72 23.5,87 24.77,87 26.04,87 27.3,87 28.57,87 29.84,87 31.11,87 32.38,87
  pour Bottom: 19.05,88.9 40.01,88.9 40.01,78.74 19.05,78.74
VS_SNS3  (via drill 0.33)
  Top 0.254: TP37.1 65.41,22.48 R18.1 | Q7.2-D v71.75,27.94
  Top 1.27: 66.67,22.54 R18.1
  Top 2.54: Q7.2-D 72.07,27.94 66.67,22.54
  other vias: 75.56,23.5 75.56,24.77 75.56,26.04 75.56,27.3 75.56,28.57 75.56,29.84 75.56,31.11 75.56,32.38 74.3,24.13 74.3,25.4 74.3,26.67 74.3,27.94 74.3,29.21 74.3,30.48 74.3,31.75 73.03,23.5 73.03,24.77 73.03,26.04 73.03,27.3 73.03,28.57 73.03,29.84 73.03,31.11 73.03,32.38 71.75,31.75 71.75,30.48 71.75,29.21 71.75,26.67 71.75,25.4 71.75,24.13 70.48,23.5 70.48,24.77 70.48,26.04 70.48,27.3 70.48,28.57 70.48,29.84 70.48,31.11 70.48,32.38 69.22,31.75 69.22,30.48 69.22,29.21 69.22,27.94 69.22,26.67 69.22,25.4 69.22,24.13 67.94,23.5 67.94,24.77 67.94,26.04 67.94,27.3 67.94,28.57 67.94,29.84 67.94,31.11 67.94,32.38
  pour Bottom: 66.04,19.05 66.04,40.01 76.2,40.01 76.2,19.05

## Text on the board
tPlace: C9 | VS+ | R3 | VS- | C8 | L1 | C4 | GND | HO- | R1 | Q1 | GND | HO+ | VO+ | R5 | VO- | VM+ | R4 | VB | C1 | VM- | VIN | C2 | D1 | 12V | LO- | HIN | C7 | VOUT | R2 | Q2 | LIN | U1 | LO+ | GND | C9 | VS+ | VS- | GND | VOUT | R3 | C8 | L1 | VO- | C4 | GND | HO- | R1 | Q1 | R5 | GND | R5 | HO+ | VO+ | VO- | VM+ | R4 | VM- | VB | C1 | VIN | C8 | VO+ | C7 | C2 | D1 | 12V | LO- | L1 | HIN | R2 | C7 | VOUT | Q2 | LIN | U1 | LO+ | GND | C9 | VS+ | R3 | VS- | C8 | L1 | VS- | Q1 | Q2 | C4 | VM- | GND | R1 | HO- | Q1 | R3 | R1 | R2 | GND | VO+ | R5 | VO- | R4 | HO+ | VM+ | VB | R4 | VM- | VIN | C1 | C9 | VS+ | D1 | LO- | LO+ | C2 | C4 | HO- | HO+ | VM+ | D1 | C1 | 12V | VB | LO- | U1 | HIN | R2 | Q2 | C7 | VOUT | GND | VIN | C2 | 12V | HIN | LIN | GND | LIN | U1 | LO+ | GND
bPlace: C3 | C5 | C6 | C3 | C5 | C5 | C6 | C6 | C3 | C5 | C6 | C3
tStop: v1.0 | EG2131 + STB45N30M5 | synch. module | v1.0 | EG2131 + STB45N30M5 | synch. module | v1.0 | EG2131 + STB45N30M5 | synch. module | synch. module | EG2131 + STB45N30M5 | v1.0
bStop: justin kenny 2019 | justin kenny 2019 | justin kenny 2019 | justin kenny 2019